# Allegro board layout_12.brd
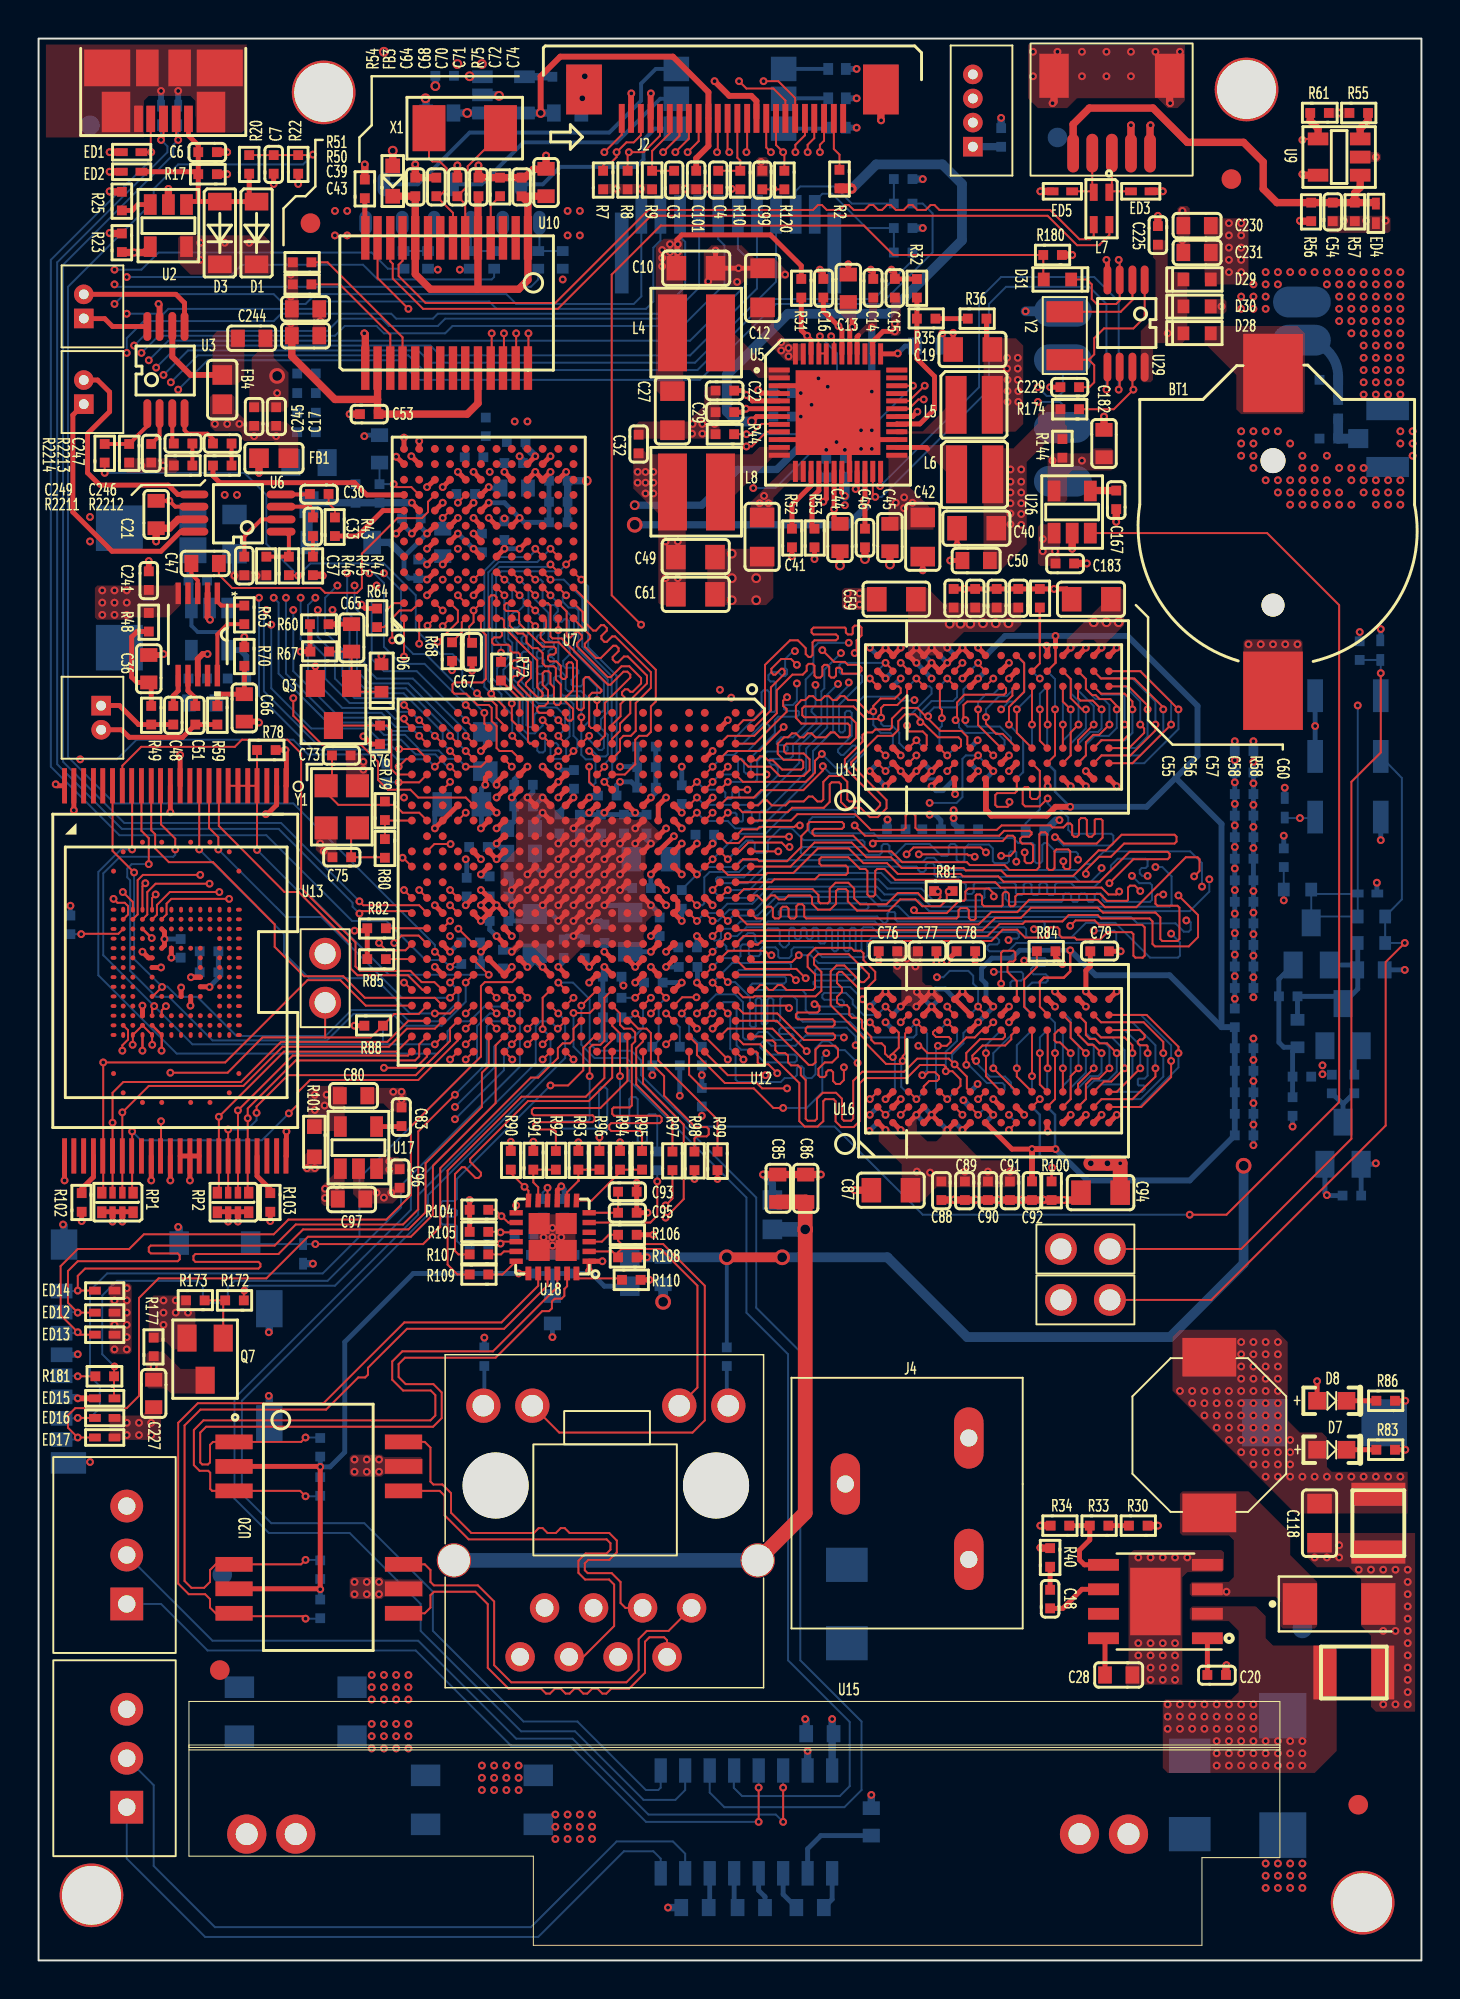
[diagram p0: board, top side]
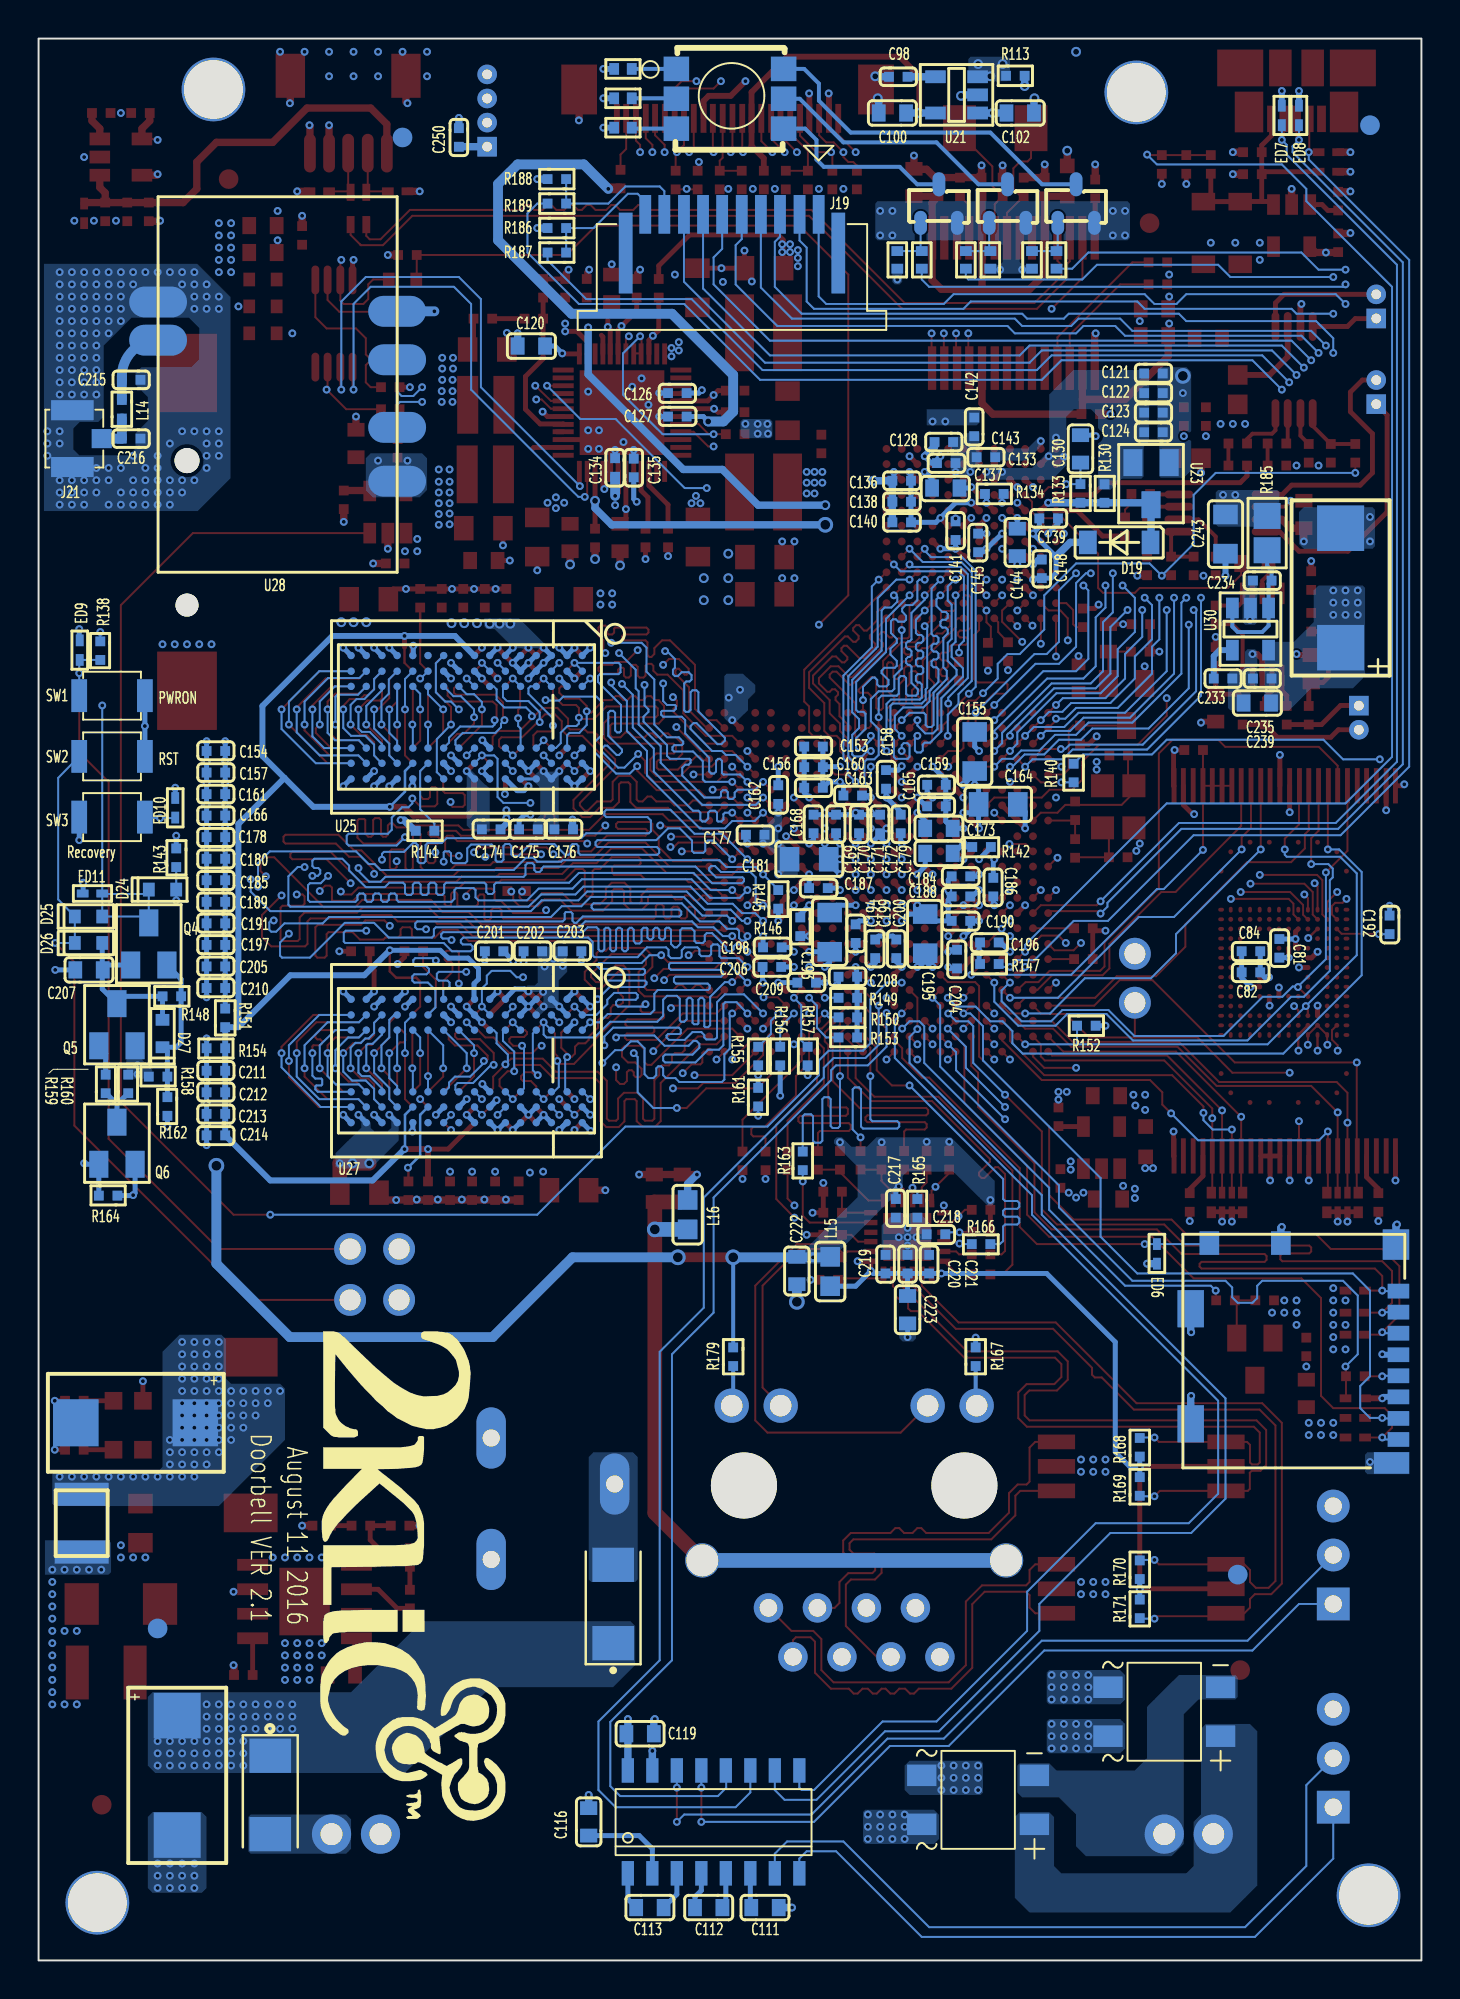
[diagram p1: board, bottom side, seen from below]

Outline 71.7 x 99.7 mm; copper layers: TOP, GND, VCC, SIG4, GND5, BOTTOM. Coordinates in mm from the lower left corner of the outline.
Outline path: rectangle 0,0 71.7,99.7

## Design rules (mm)
net group USB_CAM: nets N85032437 N85032439
net group USB_D1: nets HOST_DM1 HOST_DP1
net group USB_D2: nets HOST_DM2 HOST_DP2
net group USB_D3: nets HOST_DM3 HOST_DP3
net group USB_D4: nets HOST_DM4 HOST_DP4
net group USB_HOST: nets HOST_DM HOST_DP
net group USB_OTG: nets OTG_DM OTG_DP
net group CIF: nets CIF0_PDN CIF1_PDN CIF_CLKI CIF_CLKO CIF_D2 CIF_D3 CIF_D4 CIF_D5 CIF_D6 CIF_D7 CIF_D8 CIF_D9 CIF_HREF CIF_VSYNC
net group DDR_D0: nets DDR_D0 DDR_D1 DDR_D2 DDR_D3 DDR_D4 DDR_D5 DDR_D6 DDR_D7 DDR_DM0 DDR_DQS0M DDR_DQS0P
net group DDR_D1: nets DDR_D8 DDR_D9 DDR_D10 DDR_D11 DDR_D12 DDR_D13 DDR_D14 DDR_D15 DDR_DM1 DDR_DQS1M DDR_DQS1P
net group DDR_D2: nets DDR_D16 DDR_D17 DDR_D18 DDR_D19 DDR_D20 DDR_D21 DDR_D22 DDR_D23 DDR_DM2 DDR_DQS2M DDR_DQS2P
net group DDR_D3: nets DDR_D24 DDR_D25 DDR_D26 DDR_D27 DDR_D28 DDR_D29 DDR_D30 DDR_D31 DDR_DM3 DDR_DQS3M DDR_DQS3P
net group LCD1_RGB: nets LCDC_D0 LCDC_D1 LCDC_D2 LCDC_D3 LCDC_D4 LCDC_D5 LCDC_D6 LCDC_D7 LCDC_D8 LCDC_D9 LCDC_D10 LCDC_D11 LCDC_D12 LCDC_D13 LCDC_D14 LCDC_D15 LCDC_D16 LCDC_D17 LCDC_D18 LCDC_D19 LCDC_D20 LCDC_D21 LCDC_D22 LCDC_D23 LCDC_DE LCDC_HSYNC LCDC_VSYNC
net group NAND: nets FLASH_ALE FLASH_CLE FLASH_CS0 FLASH_CS1 FLASH_CS3 FLASH_RDN FLASH_RDY FLASH_WRN
net group RMII: nets RX+ RX- TX+ TX-
net group SDMMC: nets SDMMC_CLK SDMMC_CMD SDMMC_D0 SDMMC_D1 SDMMC_D2 SDMMC_D3
net group WENET: nets W_RXN W_RXP W_TXN W_TXP

## Placement (name value [footprint] x y rotation side)
BT1  BAT_3V  [BAT_CR1220]  64.01 73.99 0 top
C3  100nF  [C0402]  32.96 92.35 90 top
C4  8pF  [C0402]  35.24 92.35 90 top
C6  4.7uF  [C0402]  8.76 93.8 180 top
C7  10nF  [C0402]  12.19 93.17 90 top
C9  22uF  [CAP_1210]  69.47 22.68 270 top
C10  10uF  [C0805]  34.09 87.78 0 top
C11  22uF  [CAP_1210]  69.47 22.68 270 bottom
C12  10uF  [C0805]  37.54 86.77 270 top
C13  1uF  [C0603]  41.99 86.74 180 top
C14  2.2uF  [C0402]  43.28 86.74 270 top
C15  2.2uF  [C0402]  44.4 86.74 270 top
C16  2.2uF  [C0402]  40.69 86.74 270 top
C17  100nF  [C0402]  12.32 80.09 90 top
C18  4.7nF  [C0402]  52.45 18.75 90 top
C19  10uF  [C0805]  48.44 83.57 0 top
C20  10nF  [C0402]  61.09 14.81 0 top
C21  10uF  [C0603]  6.1 75.01 0 top
C22  2.2uF  [C0402]  35.59 81.43 0 top
C27  22uF  [C0805]  32.87 80.39 90 top
C28  100nF  [C0603]  56.01 14.81 90 top
C29  1uF  [C0402]  35.59 80.31 180 top
C30  100nF  [C0402]  14.55 76.07 180 top
C32  1uF  [C0402]  31.11 78.66 270 top
C33  100nF  [C0402]  14.22 74.37 90 top
C36  2.2uF  [C0603]  5.71 67.01 0 top
C37  1uF  [C0402]  10.67 72.34 90 top
C39  1uF  [C0603]  13.84 85.67 90 top
C40  22uF  [C0805]  48.64 74.3 180 top
C41  10uF  [C0805]  37.52 73.84 90 top
C42  10uF  [C0805]  45.85 73.84 90 top
C43  4.7uF  [C0603]  13.84 84.28 90 top
C44  1uF  [C0603]  41.55 73.81 0 top
C45  10uF  [C0603]  44.15 73.81 0 top
C46  2.2uF  [C0402]  42.85 73.79 90 top
C47  100nF  [C0603]  8.64 72.47 90 top
C48  100nF  [C0402]  6.99 64.59 90 top
C49  22uF  [C0805]  34.06 72.8 180 top
C50  10uF  [C0603]  48.62 72.62 270 top
C51  100nF  [C0402]  8.13 64.59 90 top
C53  100nF  [C0402]  17.14 80.21 0 top
C54  4.7uF  [C0402]  67.11 90.7 90 top
C55  100nF  [C0402]  47.45 70.66 90 top
C56  100nF  [C0402]  48.56 70.66 90 top
C57  100nF  [C0402]  49.68 70.66 90 top
C58  100nF  [C0402]  50.8 70.66 90 top
C59  10uF  [C0805]  44.48 70.61 0 top
C60  10uF  [C0805]  54.58 70.61 0 top
C61  10uF  [C0805]  34.06 70.87 0 top
C64  100nF  [C0402]  19.53 92 270 top
C65  1uF  [C0603]  16.23 68.61 0 top
C66  2.2uF  [C0603]  10.67 64.97 180 top
C67  1nF  [C0402]  22.48 67.87 270 top
C68  22pF  [C0402]  20.62 92 90 top
C70  22pF  [C0402]  21.72 92 90 top
C71  100nF  [C0402]  22.81 92 270 top
C72  100nF  [C0402]  25.04 92 270 top
C73  8pF  [C0402]  15.7 62.51 0 top
C74  4.7uF  [C0603]  26.31 92.23 180 top
C75  8pF  [C0402]  15.72 57.23 180 top
C76  100nF  [C0402]  44.04 52.35 180 top
C77  100nF  [C0402]  46.08 52.35 0 top
C78  100nF  [C0402]  48.08 52.35 180 top
C79  100nF  [C0402]  55.02 52.35 0 top
C80  4.7uF  [C0603]  16.33 44.86 270 top
C81  100nF  [C0402]  7.37 52.5 90 bottom
C82  100nF  [C0402]  8.84 51.26 0 bottom
C83  100nF/NC  [C0402]  18.82 43.76 270 top
C84  100nF  [C0402]  8.84 52.35 0 bottom
C85  100nF  [C0603]  38.33 40.06 180 top
C86  100nF  [C0603]  39.78 40.06 180 top
C87  10uF  [C0805]  44.2 39.95 0 top
C88  100nF  [C0402]  46.81 39.93 270 top
C89  100nF  [C0402]  48.03 39.93 270 top
C90  100nF  [C0402]  49.23 39.93 270 top
C91  100nF  [C0402]  50.37 39.93 270 top
C92  1nF  [C0402]  51.51 39.93 90 top
C93  100pF  [C0402]  30.53 39.88 0 top
C94  10uF  [C0805]  55.07 39.83 0 top
C95  1uF  [C0402]  30.53 38.79 0 top
C96  100nF/NC  [C0402]  18.72 40.56 270 top
C97  4.7uF/NC  [C0603]  16.23 39.5 270 top
C98  100nF  [C0402]  27.13 97.71 180 bottom
C99  NC  [C0402]  37.53 92.35 270 top
C100  10uF  [C0603]  27.43 95.83 90 bottom
C101  1uF  [C0402]  34.1 92.35 270 top
C102  4.7uF  [C0603]  20.8 95.83 270 bottom
C103  22uF  [CAP_1210]  68.2 14.94 0 top
C107  100uF/25v  [CAPP_TAJ_D]  64.52 9.6 270 bottom
C111  100nF  [C0603]  34.04 2.74 270 bottom
C112  100nF  [C0603]  36.96 2.74 90 bottom
C113  100nF  [C0603]  40.01 2.74 270 bottom
C114  220uF/10V  [CAPP_TAJ_D]  66.67 27.89 0 bottom
C116  100nF  [C0603]  43.18 7.19 180 bottom
C118  10uF  [C0805]  66.42 22.68 270 top
C119  100nF  [C0603]  40.51 11.76 90 bottom
C120  1uF  [C0603]  46.15 83.74 90 bottom
C121  100nF  [C0402]  13.89 82.32 180 bottom
C122  100nF  [C0402]  13.89 81.31 180 bottom
C123  100nF  [C0402]  13.89 80.29 180 bottom
C124  2.2uF  [C0402]  13.89 79.27 0 bottom
C126  2.2uF  [C0402]  38.58 81.31 180 bottom
C127  2.2uF  [C0402]  38.58 80.09 180 bottom
C128  100nF  [C0402]  24.77 78.77 0 bottom
C130  4.7uF  [C0603]  17.68 78.41 180 bottom
C133  1uF  [C0402]  24.64 77.67 180 bottom
C134  2.2uF  [C0402]  41.81 77.44 270 bottom
C135  47nF  [C0402]  40.84 77.42 90 bottom
C136  100nF  [C0402]  26.95 76.76 0 bottom
C137  4.7uF  [C0603]  24.66 76.38 90 bottom
C138  100nF  [C0402]  26.95 75.67 0 bottom
C139  100nF  [C0402]  19.33 74.8 180 bottom
C140  100nF  [C0402]  26.95 74.6 0 bottom
C141  100nF  [C0402]  24.16 74.17 90 bottom
C142  2.2uF  [C0402]  23.19 79.55 90 bottom
C143  100nF  [C0402]  22.58 77.98 180 bottom
C144  4.7uF  [C0603]  20.95 73.56 0 bottom
C145  100nF  [C0402]  22.99 73.53 90 bottom
C148  1uF  [C0402]  19.68 72.19 270 bottom
C153  1uF  [C0402]  31.52 62.97 0 bottom
C154  100nF  [C0402]  62.51 62.74 0 bottom
C155  10uF  [C0805]  23.16 62.71 90 bottom
C156  100nF  [C0402]  31.52 61.9 0 bottom
C157  100nF  [C0402]  62.51 61.62 0 bottom
C158  100nF  [C0402]  27.76 61.26 270 bottom
C159  100nF  [C0402]  25.15 60.99 180 bottom
C160  100nF  [C0402]  31.52 60.83 0 bottom
C161  100nF  [C0402]  62.51 60.5 0 bottom
C162  100nF  [C0402]  33.35 60.48 90 bottom
C163  100nF  [C0402]  29.49 60.43 180 bottom
C164  10uF  [C0805]  21.95 59.97 180 bottom
C165  100nF  [C0402]  25.15 59.87 180 bottom
C166  100nF  [C0402]  62.51 59.39 0 bottom
C167  100nF/NC  [C0402]  55.88 75.77 90 top
C168  100nF  [C0402]  31.52 58.95 270 bottom
C169  100nF  [C0402]  30.35 58.95 270 bottom
C170  100nF  [C0402]  29.16 58.95 270 bottom
C171  100nF  [C0402]  28.07 58.95 270 bottom
C172  100nF  [C0402]  27 58.95 90 bottom
C173  1uF  [C0603]  25.02 58.72 90 bottom
C174  100nF  [C0402]  48.23 58.67 180 bottom
C175  100nF  [C0402]  46.3 58.67 0 bottom
C176  100nF  [C0402]  44.48 58.67 180 bottom
C177  100nF  [C0402]  34.54 58.39 0 bottom
C178  100nF  [C0402]  62.51 58.27 0 bottom
C179  100nF  [C0603]  25.02 57.43 90 bottom
C180  100nF  [C0402]  62.51 57.15 0 bottom
C181  10uF  [C0805]  31.75 57.12 0 bottom
C182  4.7uF  [C0603]  55.24 78.69 180 top
C183  1uF  [C0402]  53.21 72.47 0 top
C184  10nF  [C0402]  23.88 56.24 0 bottom
C185  100nF  [C0402]  62.51 56.03 0 bottom
C186  100nF  [C0402]  22.2 55.68 90 bottom
C187  100nF  [C0402]  31.27 55.63 180 bottom
C188  100nF  [C0402]  23.88 55.19 0 bottom
C189  100nF  [C0402]  62.51 54.91 0 bottom
C190  1uF  [C0402]  23.88 53.92 0 bottom
C191  100nF  [C0402]  62.51 53.8 0 bottom
C192  100nF/NC  [C0402]  1.65 53.72 270 bottom
C193  10uF  [C0805]  30.68 53.34 90 bottom
C194  100nF  [C0402]  29.34 53.26 90 bottom
C195  10uF  [C0805]  25.73 53.26 90 bottom
C196  100nF  [C0402]  22.4 52.81 180 bottom
C197  100nF  [C0402]  62.51 52.68 0 bottom
C198  100nF  [C0402]  33.66 52.55 0 bottom
C199  100nF  [C0402]  28.32 52.48 270 bottom
C200  100nF  [C0402]  27.23 52.48 270 bottom
C201  100nF  [C0402]  48.08 52.35 180 bottom
C202  100nF  [C0402]  46.08 52.35 0 bottom
C203  100nF  [C0402]  44.04 52.35 180 bottom
C204  100nF  [C0402]  24.08 51.94 270 bottom
C205  100nF  [C0402]  62.51 51.56 0 bottom
C206  100nF  [C0402]  33.68 51.54 0 bottom
C207  1uF  [C0603]  69.09 51.38 270 bottom
C208  100nF  [C0402]  29.74 51.03 0 bottom
C209  100nF  [C0402]  31.88 50.72 0 bottom
C210  100nF  [C0402]  62.51 50.44 0 bottom
C211  1nF  [C0402]  62.51 46.15 0 bottom
C212  1nF  [C0402]  62.51 45.03 180 bottom
C213  1nF  [C0402]  62.51 43.92 0 bottom
C214  1nF  [C0402]  62.51 42.8 180 bottom
C215  NC  [C0402]  66.9 81.99 0 bottom
C216  NC  [C0402]  66.9 78.94 0 bottom
C217  100nF  [C0402]  27.25 39.01 90 bottom
C218  12pF  [C0402]  25.17 37.67 180 bottom
C219  100nF  [C0402]  27.79 36.12 90 bottom
C220  100nF  [C0402]  26.64 36.12 90 bottom
C221  22nF  [C0402]  25.53 36.12 90 bottom
C222  4.7uF  [C0603]  32.38 35.79 0 bottom
C223  4.7uF  [C0603]  26.64 33.76 180 bottom
C225  1uF  [C0402]  58.04 89.48 270 top
C227  4.7uF  [C0603]  5.97 29.41 180 top
C229  12pF  [C0402]  53.47 81.61 180 top
C230  4.7uF  [C0603]  60.07 89.99 90 top
C231  4.7uF  [C0603]  60.07 88.6 90 top
C233  22nF  [C0402]  10.29 66.5 180 bottom
C234  1uF  [C0402]  8.26 71.58 180 bottom
C235  1uF  [C0402]  8.26 66.5 180 bottom
C239  100nF  [C0603]  8.51 65.23 90 bottom
C240  220uF  [CAPP_TAJ_D]  4.19 71.2 90 bottom
C241  100nF  [C0402]  5.71 71.58 270 top
C243  10uF  [C0805]  10.16 73.99 270 bottom
C244  10uF  [C0603]  11.05 84.15 90 top
C245  100nF  [C0402]  11.18 80.09 90 top
C246  100nF  [C0402]  9.53 78.69 180 top
C247  1uF  [C0402]  5.84 78.18 90 top
C249  100nF  [C0402]  7.49 78.69 180 top
C250  100nF  [C0402]  49.91 94.56 270 bottom
D1  1N5819  [SOD123]  11.3 89.61 90 top
D3  1N5819  [SOD123]  9.4 89.61 90 top
D4  SS34  [SK34A]  67.44 18.49 0 top
D6  1N4148  [SOD523]  17.78 66.52 90 top
D7  LED  [SM0603LED_AC]  67.06 26.49 0 top
D8  LED  [SM0603LED_AC]  67.06 29.03 0 top
D11  MB1S-TP  [TO-269AA]  23.62 8.33 270 bottom
D12  SS34  [SK34A]  41.91 18.49 90 bottom
D19  1N5819  [SOD123]  15.67 73.56 180 bottom
D22  SS34  [SK34A]  59.69 8.59 270 bottom
D24  1N4148  [SOD523]  65.28 55.55 180 bottom
D25  1N4148  [SOD523]  69.11 54.15 180 bottom
D26  1N4148  [SOD523]  69.11 52.78 180 bottom
D27  1N4148  [SOD523]  65.28 48.08 90 bottom
D28  1N4148  [SOD523]  60.07 84.4 0 top
D29  1N4148/NC  [SOD523]  60.07 87.2 0 top
D30  1N4148  [SOD523]  60.07 85.8 0 top
D31  1N4148  [SOD523]  52.83 87.2 180 top
D32  MB1S-TP  [TO-269AA]  13.97 12.9 270 bottom
ED1  ESD9B5VL  [ESD0402]  4.83 93.8 180 top
ED2  ESD9B5VL  [ESD0402]  4.83 92.79 180 top
ED3  ESD9B5VL  [ESD0402]  57.15 91.77 0 top
ED4  ESD9B5VL  [ESD0402]  69.34 90.63 270 top
ED5  ESD9B5VL  [ESD0402]  53.09 91.77 180 top
ED6  ESD9B5VL  [ESD0402]  13.72 36.65 270 bottom
ED7  ESD9B5VL  [ESD0402]  7.24 95.71 90 bottom
ED8  ESD9B5VL  [ESD0402]  6.35 95.71 90 bottom
ED9  ESD9B5VL  [ESD0402]  69.57 67.97 270 bottom
ED10  ESD9B5VL  [ESD0402]  64.62 59.79 270 bottom
ED11  ESD9B5VL  [ESD0402]  68.91 55.35 180 bottom
ED12  ESD9B5VL  [ESD0402]  3.43 33.6 0 top
ED13  ESD9B5VL  [ESD0402]  3.43 32.46 0 top
ED14  ESD9B5VL  [ESD0402]  3.43 34.75 0 top
ED15  ESD9B5VL  [ESD0402]  3.43 29.16 180 top
ED16  ESD9B5VL  [ESD0402]  3.43 28.14 0 top
ED17  ESD9B5VL  [ESD0402]  3.43 27.13 0 top
FB1  BLM18PG181SN1  [L0603]  12.19 77.93 180 top
FB3  BLM18PG181SN1  [D0603]  18.36 92.3 270 top
FB4  BLM18PG181SN1  [L0603]  9.53 81.48 90 top
J2  OV2659  [FPC05P24]  35.98 96.93 180 top
J4  DCIN_JACK  [PJ-033A]  45.03 24.71 180 top
J5  HUM011D-5-S  [CON5_MICROUSB_SKT_SM]  6.48 96.85 270 top
J6  HEADER 3  [CONN3_BOX]  4.57 9.22 90 top
J7  HEADER 3  [CONN3_BOX]  4.57 19.76 90 top
J8  CON2  [HEARDER_2_PITCH_1P25MM]  2.79 81.36 180 top
J9  HEADER 7  [USB_CAM]  56.64 98.76 90 top
J10  CON2  [HEARDER_2_PITCH_1P25MM]  2.79 64.47 0 top
J13  CON2/NC  [CON_2]  14.86 50.95 90 top
J14  RJ45  [RJ45-VERTICAL]  29.54 19.63 270 top
J15  TF_SD_SOCKET  [USD_SOCKET]  0.89 31.57 90 bottom
J19  HEADER 10  [SFW10R-1STE1LF]  35.75 87.58 0 bottom
J21  CON3  [ANTENNA_WIFI]  69.95 78.94 90 bottom
J1838  LEDRGB  [SMD_LED_RGB]  36.32 96.72 180 bottom
J1839  CON2  [HEARDER_2_PITCH_1P25MM]  2.79 85.8 180 top
J1840  CON4  [HEARDER_4_PITCH_1P25MM]  48.9 95.96 180 top
L3  6.8uH/4.4A  [IND_HEX]  60.71 27.25 90 top
L4  2.2uH/3A  [IN4D_5X5]  34.11 84.43 90 top
L5  2.2uH/1.6A  [IND_3X3]  48.51 80.7 90 top
L6  2.2uH/1.6A  [IND_3X3]  48.54 77.09 90 top
L7  WCM-2012HDMI-900T  [WCM_2012HDMI_900T]  55.12 90.88 180 top
L8  2.2uH/3A  [IN4D_5X5]  34.11 76.17 90 top
L14  0R  [R0402]  67.39 80.47 90 bottom
L15  BLM18PG181SN1  [L0603]  30.66 35.74 270 bottom
L16  BLM18PG181SN1  [L0603]  38.05 38.68 270 bottom
NOREF  -  [unnamed]  68.43 8.08 0 top
NOREF#2  -  [unnamed#2]  14.78 96.9 0 top
NOREF#3  -  [unnamed]  61.85 92.41 0 top
NOREF#4  -  [unnamed]  14.1 90.12 0 top
NOREF#5  -  [unnamed#2]  62.64 97.05 0 top
NOREF#6  -  [unnamed#2]  68.66 3 0 top
NOREF#7  -  [unnamed#2]  2.74 3.38 0 top
NOREF#8  -  [unnamed]  9.4 15.06 0 top
NOREF#9  -  [unnamed]  65.53 17.22 180 bottom
NOREF#10  -  [unnamed]  9.53 20.02 180 bottom
NOREF#11  -  [#2]  57.12 32.64 270 bottom
NOREF#12  -  [unnamed]  52.83 94.56 180 bottom
NOREF#13  -  [unnamed]  2.67 95.2 180 bottom
Q3  SI2302  [SOT23]  15.29 65.15 180 top
Q4  SI2301  [SOT23]  65.99 52.73 180 bottom
Q5  SI2302  [SOT23]  67.64 48.54 180 bottom
Q6  SI2301  [SOT23]  67.64 42.39 180 bottom
Q7  SI2301  [SOT23]  8.64 31.19 180 top
Q806  C1815  [SOT23_2]  17.91 91.14 90 bottom
Q807  C1815  [SOT23_2]  21.46 91.14 90 bottom
Q808  C1815  [SOT23_2]  25.02 91.14 90 bottom
R2  0R  [R0402]  41.53 92.41 90 top
R7  1.5K  [R0402]  29.27 92.35 90 top
R8  1.5K  [R0402]  30.54 92.35 90 top
R9  10K  [R0402]  31.81 92.35 270 top
R10  22R  [R0402]  36.39 92.35 90 top
R17  10K  [R0402]  8.76 92.66 180 top
R20  10K  [R0402]  10.92 93.17 270 top
R22  15K  [R0402]  13.46 93.17 90 top
R23  47K  [R0402]  4.32 89.1 270 top
R25  NC  [R0402]  4.32 91.26 270 top
R30  1K  [R0402]  57.02 22.56 0 top
R31  100R  [R0402]  39.55 86.74 90 top
R32  20K  [R0402]  45.54 86.74 270 top
R33  44.2K  [R0402]  54.99 22.56 0 top
R34  10K  [R0402]  52.96 22.56 0 top
R35  4.99K  [R0402]  46.02 85.17 180 top
R36  100R  [R0402]  48.67 85.17 180 top
R40  20K  [R0402]  52.45 20.9 90 top
R43  62K  [R0402]  15.37 74.37 270 top
R44  100K  [R0402]  35.59 79.17 0 top
R45  30K  [R0402]  14.22 72.34 270 top
R46  1M  [R0402]  11.81 72.34 270 top
R47  100K  [R0402]  12.98 72.34 270 top
R48  1K  [R0402]  5.71 69.42 270 top
R49  1K  [R0402]  5.84 64.59 270 top
R50  4.7K  [R0402]  13.67 86.94 180 top
R51  100K  [R0402]  13.67 88.09 180 top
R52  100R  [R0402]  39.07 73.79 270 top
R53  10K  [R0402]  40.23 73.79 270 top
R54  10K  [R0402]  16.92 91.9 270 top
R55  NC  [R0402]  68.45 95.83 0 top
R56  0R/NC  [R0402]  65.99 90.7 270 top
R57  10K  [R0402]  68.25 90.7 90 top
R58  240R%1  [R0402]  51.92 70.66 270 top
R59  1K  [R0402]  9.27 64.59 90 top
R60  10K  [R0402]  14.55 69.32 0 top
R61  47K  [R0402]  66.42 95.83 180 top
R63  11K  [R0402]  10.67 69.8 270 top
R64  2K  [R0402]  17.55 69.65 270 top
R67  1M  [R0402]  14.58 67.89 0 top
R68  4.7K  [R0402]  21.44 67.89 270 top
R70  1K  [R0402]  10.67 67.64 90 top
R72  0R  [R0402]  23.98 66.88 270 top
R75  680R  [R0402]  23.93 92 270 top
R76  10K  [R0402]  17.7 63.58 90 top
R78  4.7K  [R0402]  11.81 62.79 180 top
R79  1M  [R0402]  17.96 59.64 90 top
R80  22R  [R0402]  17.96 57.68 90 top
R81  100R  [R0402]  46.91 55.47 180 top
R82  200R  [R0402]  17.53 53.54 0 top
R83  1K  [R0402]  69.85 26.49 180 top
R84  240R%1  [R0402]  52.25 52.35 180 top
R85  200R  [R0402]  17.53 51.94 0 top
R86  680R  [R0402]  69.85 29.03 0 top
R88  10K/NC  [R0402]  17.37 48.49 0 top
R90  2K  [R0402]  24.49 41.5 270 top
R91  NC  [R0402]  25.65 41.5 270 top
R92  22R  [R0402]  26.82 41.5 270 top
R93  4.7K  [R0402]  27.99 41.5 270 top
R94  4.7K  [R0402]  30.15 41.5 270 top
R95  22R  [R0402]  31.29 41.5 270 top
R96  22R  [R0402]  29.08 41.5 270 top
R97  22R  [R0402]  32.87 41.48 270 top
R98  22R  [R0402]  34.01 41.48 270 top
R99  22R  [R0402]  35.2 41.48 270 top
R100  240R%1  [R0402]  52.53 39.93 90 top
R101  0R  [R0603]  14.3 42.47 90 top
R102  NC  [R0402]  2.24 39.32 270 top
R103  NC  [R0402]  12.01 39.32 270 top
R104  4.7K  [R0402]  22.83 38.94 0 top
R105  10K  [R0402]  22.83 37.8 0 top
R106  10K  [R0402]  30.53 37.64 0 top
R107  22R  [R0402]  22.83 36.63 0 top
R108  10K  [R0402]  30.53 36.47 0 top
R109  22R  [R0402]  22.83 35.59 0 top
R110  12.1K%1  [R0402]  30.73 35.31 0 top
R113  10K  [R0402]  21.06 97.76 180 bottom
R120  22R  [R0402]  38.67 92.35 90 top
R130  0R/NC  [R0402]  16.43 76.1 90 bottom
R133  0R  [R0402]  17.68 76.1 270 bottom
R134  12K  [R0402]  22.15 76.07 180 bottom
R138  51K  [R0402]  68.5 67.95 270 bottom
R140  4.7K  [R0402]  18.03 61.59 270 bottom
R141  240R%1  [R0402]  51.66 58.6 180 bottom
R142  0R  [R0402]  22.81 57.76 0 bottom
R143  10K  [R0402]  64.57 57.2 90 bottom
R144  0R/NC  [R0402]  53.09 78.44 270 top
R145  2K  [R0402]  33.35 55.04 270 bottom
R146  240R%1  [R0402]  32.21 53.62 90 bottom
R147  10K  [R0402]  22.4 51.69 180 bottom
R148  1M  [R0402]  64.8 50.01 180 bottom
R149  10K  [R0402]  29.74 49.94 180 bottom
R150  10K  [R0402]  29.74 48.92 180 bottom
R151  10K  [R0402]  62.03 48.89 270 bottom
R152  10K/NC  [R0402]  17.37 48.49 0 bottom
R153  10K  [R0402]  29.74 47.88 180 bottom
R154  10K  [R0402]  62.51 47.32 180 bottom
R155  2K  [R0402]  34.39 46.91 90 bottom
R156  2K  [R0402]  33.25 46.91 90 bottom
R157  2K  [R0402]  31.83 46.91 90 bottom
R158  10K  [R0402]  65.51 45.85 180 bottom
R159  47K  [R0402]  68.22 45.47 90 bottom
R160  1M  [R0402]  67.06 45.47 90 bottom
R161  2K  [R0402]  34.39 44.78 270 bottom
R162  4.7K  [R0402]  65.02 44.3 90 bottom
R163  22R  [R0402]  32.08 41.48 270 bottom
R164  1M  [R0402]  68.1 39.67 0 bottom
R165  4.7K  [R0402]  26.14 39.01 90 bottom
R166  22R  [R0402]  22.83 37.16 0 bottom
R167  470R  [R0402]  23.11 31.32 90 bottom
R168  49.9R%1  [R0402]  14.61 26.62 90 bottom
R169  49.9R%1  [R0402]  14.61 24.59 270 bottom
R170  49.9R%1  [R0402]  14.61 20.27 90 bottom
R171  49.9R%1  [R0402]  14.61 18.24 270 bottom
R172  1K  [R0402]  10.16 34.24 0 top
R173  100K  [R0402]  8.13 34.24 180 top
R174  10K  [R0402]  53.47 80.47 0 top
R177  0R/NC  [R0402]  5.97 31.83 270 top
R179  470R  [R0402]  35.69 31.32 90 bottom
R180  10K  [R0402]  52.58 88.47 0 top
R181  22R  [R0402]  3.43 30.3 180 top
R185  10  [R0805]  8 74.04 270 bottom
R186  0R/NM  [R0402]  44.83 89.87 180 bottom
R187  0R  [R0402]  44.83 88.6 180 bottom
R188  0R/NM  [R0402]  44.83 92.41 0 bottom
R189  0R  [R0402]  44.83 91.14 180 bottom
R2202  220R  [SMR0402]  41.4 98.12 180 bottom
R2203  220R  [SMR0402]  41.4 96.6 180 bottom
R2204  220R  [SMR0402]  41.4 95.07 180 bottom
R2205  1K  [SMR0402]  18.92 88.21 90 bottom
R2206  10K  [SMR0402]  20.19 88.21 270 bottom
R2207  1K  [SMR0402]  23.62 88.21 90 bottom
R2208  10K  [SMR0402]  22.35 88.21 270 bottom
R2209  1K  [SMR0402]  25.91 88.21 90 bottom
R2210  10K  [SMR0402]  27.18 88.21 270 bottom
R2211  30K  [R0402]  7.49 77.55 180 top
R2212  62K  [R0402]  9.53 77.55 180 top
R2213  1M  [R0402]  4.7 78.18 270 top
R2214  100K  [R0402]  3.43 78.18 270 top
RP1  10K/NC  [RCA80-8]  4.09 39.32 0 top
RP2  10K/NC  [RCA80-8]  10.08 39.32 0 top
SW1  Power  [B3U-1000P]  67.89 65.61 180 bottom
SW2  Power  [B3U-1000P]  67.89 62.46 180 bottom
SW3  Power  [B3U-1000P]  67.89 59.31 0 bottom
U2  TCS9708  [SOT23-5]  6.73 89.99 180 top
U3  TCS8642B/PT5305N_DS  [MSOP8]  6.6 82.5 0 top
U4  -  [MP2365]  57.91 18.62 90 top
U5  ACT8846QM460  [QFN48]  41.45 80.29 270 top
U6  TCS8642B/PT5305N_DS  [MSOP8]  10.31 75.08 90 top
U7  RK610&616-G  [RK616_BGA144]  23.34 74.02 90 top
U8  MAX4062  [USOP_10P]  8.26 68.78 270 top
U9  TCS9708  [SOT23-5]  67.44 93.55 90 top
U10  GL850G  [SSOP28]  21.16 85.98 180 top
U11  DDR3-512MB  [FBGA96-10X14]  49.5 64.49 90 top
U12  RK3188  [BGA453-19X19]  28.14 55.93 270 top
U13  NAND_FLASH  [TSOP48]  7.09 51.33 270 top
U14  SDIN7DP2-4G  [FBGA169_0P5_14X18MM]  7.14 51.26 0 top
U15  POE MODULE  [POE]  35.56 5.92 0 top
U16  DDR3-512MB  [FBGA96-10X14]  49.5 46.66 90 top
U17  RT9167-30/NC  [SOT23-5]  16.59 42.16 0 top
U18  LAN8720A  [LAN8270A]  26.67 37.62 90 top
U20  MS10232  [TRC41604NL]  14.55 22.43 270 top
U21  AP7331-15  [SOT-25]  24.1 96.77 90 bottom
U22  MAX3232  [SOIC16]  36.7 7.19 90 bottom
U23  PT5110_2.5V  [SOT23]  14.02 76.61 0 bottom
U25  DDR3-512MB  [FBGA96-10X14]  49.5 64.49 270 bottom
U26  PT5108E23E-33/RT9013-33B  [SOT23-5]  53.59 75.13 0 top
U27  DDR3-512MB  [FBGA96-10X14]  49.5 46.66 270 bottom
U28  RL-UM12BS-8188EUS  [WIFI_BT_R]  59.31 81.74 90 bottom
U29  HYM8563  [MSOP8]  56.39 84.91 180 top
U30  RT9193-33GB  [SOT23-5]  8.86 69.06 0 bottom
UNK1  CON2/NC  [CON_2]  54.28 36.91 0 top
UNK2  CON2/NC  [CON_2]  54.28 34.26 0 top
X1  12M/20pF  [5032-12M]  22.1 95.05 180 top
Y1  24M-20ppm  [CRY3225_M]  15.72 59.84 90 top
Y2  32.768K  [CM315D]  53.21 84.28 270 top

## Library data of the parts
BT1 J13 UNK1 UNK2 = CON2
C3 C4 C6 C7 C17 C18 C20 C28 C30 C32 C33 C36 C37 C54 C66 C67 C73 C75 C80-C84 C96-C102 C111-C113 C116 C119 C121-C124 C128 C133 C135 C136 C138-C141 C143 C145 C148 C153 C155 C156 C158-C160 C163-C165 C168-C173 C179 C182 C184 C186 C188 C190 C192-C196 C199 C200 C204 C208 C209 C219 C220 C223 C225 C227 C229-C231 C233-C235 C239 C241 C245-C247 C249 C250 = CAP NP
C9 C11 C103 = CAP NP: User Part Number: PartNr
C10 C61 = CAP NP_2: room: USB+5V
C12 C19 C21 C27 C40-C42 C45 C49 C50 C118 C137 C142 C144 C183 C244 = CAP NP: room: USB+5V
C13-C16 C22 C29 C44 C46 C120 C126 C127 C130 C134 C207 = CAP NP_2: room: CHG
C39 C43 C65 C74 = CAPACITOR_0
C47 = CAPC-SM0402_10
C48 C51 = CAP NP_1
C53 C64 C68 C70-C72 = CAPACITOR
C55-C58 C76-C79 C88-C92 C154 C157 C161 C162 C166 C174-C178 C180 C185 C187 C189 C191 C197 C198 C201-C203 C205 C206 C210-C214 = CAP NP_0
C59 C60 C87 C93-C95 C167 C181 C217 C218 C222 = CAP NP_4
C85 C86 C221 = CAP NP_2
C107 C114 = CAP: User Part Number: PartNr
C215 C216 = C0603
C240 = CAPC-SM0402_10: User Part Number: PartNr
C243 = C0805
D1 D3 D6 D28-D31 = DIODE_0
D4 D12 = SS34_1
D7 = LED_1
D8 = LED_2
D11 D32 = DIODE BRIDGE_0
D19 = DIODE: room: BATT
D22 = SS34_0
D24-D27 = DIODE: room: CHG
ED1-ED17 = TVS
FB1 FB3 FB4 L3 L15 L16 = INDUCTOR
J2 = OV2659
J4 J8 J1839 J1840 = CON2_0
J5 = USB MIN_6
J6 J7 = HEADER 3
J9 = HEADER 7_0
J10 = HEADER 2
J14 = RJ45_0
J15 = TF_SD_SOCKET_0
J19 = HEADER 10
J21 = CON3
J1838 = CON6A
L4-L6 L8 = INDUCTOR_1: room: USB+5V
L7 = INDUCTOR-COM_0
L14 = INDUCTOR_0
Q3 Q5 = MOSFET N
Q4 Q6 = MOSFET N_0
Q7 = MOSFET P: room: CHG
Q806 Q808 = NPN BCE_0: User Part Number: PartNr
Q807 = NPN BCE_1: User Part Number: PartNr
R2 R7-R10 R17 R20 R22 R23 R25 R43 R45-R47 R50 R51 R54-R57 R60 R61 R67 R75 R76 R78-R80 R82 R85 R86 R88 R101-R103 R113 R120 R134 R138 R140 R143 R144 R147-R150 R152 R153 R155-R162 R164 R172 R177 R181 R185-R189 R2211-R2214 = RESISTOR
R30 R34 = RES-SM0402_0
R31 R32 R35 R36 R52 R91 R93 R94 R104 R105 R142 R165 = RESISTOR_1: room: USB+5V
R33 = RES-SM0402_1
R40 = RES-SM0402_2
R44 R58 R64 R68 R72 R81 R84 R100 R133 R141 R145 R146 R151 R154 = RESISTOR_0
R48 R49 R59 R63 R70 R2202-R2210 = RES-SM0603_2
R53 R173 R174 R180 = RESISTOR_4
R83 = RESD,0402,5%,1/16W,4.7K: tolerance: 5%
R90 R92 R95-R99 R106-R110 R163 R166 R167 R179 = 4,7k-0603: tolerance: 5%
R130 = R0402
R168-R171 = 100k-0603: tolerance: 5%
RP1 RP2 = RESISTOR 4PACK
SW1-SW3 = SW PUSHBUTTON
U2 U9 = LPW5206H
U3 U6 = LM4990
U4 = LM2576/TO_0
U5 = ACT8847_0
U7 = RKJETTA_BGA_0
U8 = max4062_2
U10 = GLI8024-48_3
U11 U16 U25 U27 = DDRII_3
U12 = RK3188_0
U13 = NANDFLASH_0
U14 = TMP_105147
U15 = AG8012S_0
U17 U21 U26 = DS8008_4
U18 = LAN8720A_0
U20 = LAN1102_0
U22 = MAX3232_0: User Part Number: ***; Tolerance: ***
U23 = CE71XXMM
U28 = WM-294_0
U29 = LM4990_0
U30 = RT9193-33GB
X1 Y2 = CRYSTAL DIP DT38 R_2.A
Y1 = CRYSTAL-4_0

## Footprints (pads in the part's own frame, mm; a bottom-side part is the same pattern mirrored in y, then rotated)
5032-12M
  rect 1.702x2.388 smd: 1(-1.854,0) 2(1.854,0)
ANTENNA_WIFI
  rect 1.041x2.21 smd: 1(-1.473,0) 2(1.473,0)
  rect 0.991x1.041 smd: 3(0,-1.524)
B3U-1000P
  rect 0.813x1.702 smd: 1(-1.702,0) 2(1.702,0)
BAT_CR1220
  round 1.295 hole 1.295 unplated: (0,3.81)
  round 1.194 hole 1.194 unplated: (0,-3.683)
  rect 3.099x4.064 smd: 1(0,8.357) 2(0,-8.128)
BGA453-19X19
  round 0.406 smd: A1(-8.788,8.788) A2(-8.001,8.788) A4(-6.401,8.788) A5(-5.588,8.788) A7(-3.988,8.788) A8(-3.2,8.788) A10(-1.6,8.788) A11(-0.813,8.788) A13(0.813,8.788) A14(1.6,8.788) A16(3.2,8.788) A17(3.988,8.788) A19(5.588,8.788) A20(6.401,8.788) A22(8.001,8.788) A23(8.788,8.788) AA2(-8.001,-7.188) AA3(-7.188,-7.188) AA4(-6.401,-7.188) AA5(-5.588,-7.188) AA6(-4.801,-7.188) AA7(-3.988,-7.188) AA8(-3.2,-7.188) AA9(-2.388,-7.188) AA10(-1.6,-7.188) AA11(-0.813,-7.188) AA12(0,-7.188) AA13(0.813,-7.188) AA14(1.6,-7.188) AA15(2.388,-7.188) AA16(3.2,-7.188) AA17(3.988,-7.188) AA18(4.801,-7.188) AA19(5.588,-7.188) AA20(6.401,-7.188) AA21(7.188,-7.188) AA22(8.001,-7.188) AB1(-8.788,-8.001) AB2(-8.001,-8.001) AB3(-7.188,-8.001) AB4(-6.401,-8.001) AB5(-5.588,-8.001) AB6(-4.801,-8.001) AB7(-3.988,-8.001) AB8(-3.2,-8.001) AB9(-2.388,-8.001) AB10(-1.6,-8.001) AB11(-0.813,-8.001) AB12(0,-8.001) AB13(0.813,-8.001) AB14(1.6,-8.001) AB15(2.388,-8.001) AB16(3.2,-8.001) AB17(3.988,-8.001) AB18(4.801,-8.001) AB19(5.588,-8.001) AB20(6.401,-8.001) AB21(7.188,-8.001) AB22(8.001,-8.001) AB23(8.788,-8.001) AC1(-8.788,-8.788) AC2(-8.001,-8.788) AC4(-6.401,-8.788) AC5(-5.588,-8.788) AC7(-3.988,-8.788) AC8(-3.2,-8.788) AC10(-1.6,-8.788) AC11(-0.813,-8.788) AC13(0.813,-8.788) AC14(1.6,-8.788) AC16(3.2,-8.788) AC17(3.988,-8.788) AC19(5.588,-8.788) AC20(6.401,-8.788) AC22(8.001,-8.788) AC23(8.788,-8.788) B1(-8.788,8.001) B2(-8.001,8.001) B3(-7.188,8.001) B4(-6.401,8.001) B5(-5.588,8.001) B6(-4.801,8.001) B7(-3.988,8.001) B8(-3.2,8.001) B9(-2.388,8.001) B10(-1.6,8.001) B11(-0.813,8.001) B12(0,8.001) B13(0.813,8.001) B14(1.6,8.001) B15(2.388,8.001) B16(3.2,8.001) B17(3.988,8.001) B18(4.801,8.001) B19(5.588,8.001) B20(6.401,8.001) B21(7.188,8.001) B22(8.001,8.001) B23(8.788,8.001) C2(-8.001,7.188) C3(-7.188,7.188) C4(-6.401,7.188) C5(-5.588,7.188) C6(-4.801,7.188) C7(-3.988,7.188) C8(-3.2,7.188) C9(-2.388,7.188) C10(-1.6,7.188) C11(-0.813,7.188) C12(0,7.188) C13(0.813,7.188) C14(1.6,7.188) C15(2.388,7.188) C16(3.2,7.188) C17(3.988,7.188) C18(4.801,7.188) C19(5.588,7.188) C20(6.401,7.188) C21(7.188,7.188) C22(8.001,7.188) D1(-8.788,6.401) D2(-8.001,6.401) D3(-7.188,6.401) D4(-6.401,6.401) D5(-5.588,6.401) D6(-4.801,6.401) D7(-3.988,6.401) D8(-3.2,6.401) D10(-1.6,6.401) D11(-0.813,6.401) D13(0.813,6.401) D14(1.6,6.401) D16(3.2,6.401) D17(3.988,6.401) D18(4.801,6.401) D19(5.588,6.401) D20(6.401,6.401) D21(7.188,6.401) D22(8.001,6.401) D23(8.788,6.401) E1(-8.788,5.588) E2(-8.001,5.588) E3(-7.188,5.588) E4(-6.401,5.588) E6(-4.801,5.588) E7(-3.988,5.588) E8(-3.2,5.588) E10(-1.6,5.588) E11(-0.813,5.588) E13(0.813,5.588) E14(1.6,5.588) E16(3.2,5.588) E17(3.988,5.588) E18(4.801,5.588) E20(6.401,5.588) E21(7.188,5.588) E22(8.001,5.588) E23(8.788,5.588) F2(-8.001,4.801) F3(-7.188,4.801) F4(-6.401,4.801) F5(-5.588,4.801) F7(-3.988,4.801) F8(-3.2,4.801) F10(-1.6,4.801) F11(-0.813,4.801) F13(0.813,4.801) F14(1.6,4.801) F16(3.2,4.801) F17(3.988,4.801) F19(5.588,4.801) F20(6.401,4.801) F21(7.188,4.801) F22(8.001,4.801) G1(-8.788,3.988) G2(-8.001,3.988) G3(-7.188,3.988) G4(-6.401,3.988) G5(-5.588,3.988) G6(-4.801,3.988) G8(-3.2,3.988) G9(-2.388,3.988) G10(-1.6,3.988) G11(-0.813,3.988) G12(0,3.988) G13(0.813,3.988) G14(1.6,3.988) G15(2.388,3.988) G16(3.2,3.988) G18(4.801,3.988) G19(5.588,3.988) G20(6.401,3.988) G21(7.188,3.988) G22(8.001,3.988) G23(8.788,3.988) H1(-8.788,3.2) H2(-8.001,3.2) H3(-7.188,3.2) H4(-6.401,3.2) H5(-5.588,3.2) H6(-4.801,3.2) H7(-3.988,3.2) H8(-3.2,3.2) H9(-2.388,3.2) H10(-1.6,3.2) H11(-0.813,3.2) H12(0,3.2) H13(0.813,3.2) H14(1.6,3.2) H15(2.388,3.2) H16(3.2,3.2) H17(3.988,3.2) H18(4.801,3.2) H19(5.588,3.2) H20(6.401,3.2) H21(7.188,3.2) H22(8.001,3.2) H23(8.788,3.2) J2(-8.001,2.388) J3(-7.188,2.388) J7(-3.988,2.388) J8(-3.2,2.388) J9(-2.388,2.388) J10(-1.6,2.388) J11(-0.813,2.388) J12(0,2.388) J13(0.813,2.388) J14(1.6,2.388) J15(2.388,2.388) J16(3.2,2.388) J17(3.988,2.388) J21(7.188,2.388) J22(8.001,2.388) K1(-8.788,1.6) K2(-8.001,1.6) K3(-7.188,1.6) K4(-6.401,1.6) K5(-5.588,1.6) K6(-4.801,1.6) K7(-3.988,1.6) K8(-3.2,1.6) K9(-2.388,1.6) K10(-1.6,1.6) K11(-0.813,1.6) K12(0,1.6) K13(0.813,1.6) K14(1.6,1.6) K15(2.388,1.6) K16(3.2,1.6) K17(3.988,1.6) K18(4.801,1.6) K19(5.588,1.6) K20(6.401,1.6) K21(7.188,1.6) K22(8.001,1.6) K23(8.788,1.6) L1(-8.788,0.813) L2(-8.001,0.813) L3(-7.188,0.813) L4(-6.401,0.813) L5(-5.588,0.813) L6(-4.801,0.813) L7(-3.988,0.813) L8(-3.2,0.813) L9(-2.388,0.813) L10(-1.6,0.813) L11(-0.813,0.813) L12(0,0.813) L13(0.813,0.813) L14(1.6,0.813) L15(2.388,0.813) L16(3.2,0.813) L17(3.988,0.813) L18(4.801,0.813) L19(5.588,0.813) L20(6.401,0.813) L21(7.188,0.813) L22(8.001,0.813) L23(8.788,0.813) M2(-8.001,0) M3(-7.188,0) M7(-3.988,0) M8(-3.2,0) M9(-2.388,0) M10(-1.6,0) M11(-0.813,0) M12(0,0) M13(0.813,0) M14(1.6,0) M15(2.388,0) M16(3.2,0) M17(3.988,0) M21(7.188,0) M22(8.001,0) N1(-8.788,-0.813) N2(-8.001,-0.813) N3(-7.188,-0.813) N4(-6.401,-0.813) N5(-5.588,-0.813) N6(-4.801,-0.813) N7(-3.988,-0.813) N8(-3.2,-0.813) N9(-2.388,-0.813) N10(-1.6,-0.813) N11(-0.813,-0.813) N12(0,-0.813) N13(0.813,-0.813) N14(1.6,-0.813) N15(2.388,-0.813) N16(3.2,-0.813) N17(3.988,-0.813) N18(4.801,-0.813) N19(5.588,-0.813) N20(6.401,-0.813) N21(7.188,-0.813) N22(8.001,-0.813) N23(8.788,-0.813) P1(-8.788,-1.6) P2(-8.001,-1.6) P3(-7.188,-1.6) P4(-6.401,-1.6) P5(-5.588,-1.6) P6(-4.801,-1.6) P7(-3.988,-1.6) P8(-3.2,-1.6) P9(-2.388,-1.6) P10(-1.6,-1.6) P11(-0.813,-1.6) P12(0,-1.6) P13(0.813,-1.6) P14(1.6,-1.6) P15(2.388,-1.6) P16(3.2,-1.6) P17(3.988,-1.6) P18(4.801,-1.6) P19(5.588,-1.6) P20(6.401,-1.6) P21(7.188,-1.6) P22(8.001,-1.6) P23(8.788,-1.6) R2(-8.001,-2.388) R3(-7.188,-2.388) R7(-3.988,-2.388) R8(-3.2,-2.388) R9(-2.388,-2.388) R10(-1.6,-2.388) R11(-0.813,-2.388) R12(0,-2.388) R13(0.813,-2.388) R14(1.6,-2.388) R15(2.388,-2.388) R16(3.2,-2.388) R17(3.988,-2.388) R21(7.188,-2.388) R22(8.001,-2.388) T1(-8.788,-3.2) T2(-8.001,-3.2) T3(-7.188,-3.2) T4(-6.401,-3.2) T5(-5.588,-3.2) T6(-4.801,-3.2) T7(-3.988,-3.2) T8(-3.2,-3.2) T9(-2.388,-3.2) T10(-1.6,-3.2) T11(-0.813,-3.2) T12(0,-3.2) T13(0.813,-3.2) T14(1.6,-3.2) T15(2.388,-3.2) T16(3.2,-3.2) T17(3.988,-3.2) T18(4.801,-3.2) T19(5.588,-3.2) T20(6.401,-3.2) T21(7.188,-3.2) T22(8.001,-3.2) T23(8.788,-3.2) U1(-8.788,-3.988) U2(-8.001,-3.988) U3(-7.188,-3.988) U4(-6.401,-3.988) U5(-5.588,-3.988) U6(-4.801,-3.988) U8(-3.2,-3.988) U9(-2.388,-3.988) U10(-1.6,-3.988) U11(-0.813,-3.988) U12(0,-3.988) U13(0.813,-3.988) U14(1.6,-3.988) U15(2.388,-3.988) U16(3.2,-3.988) U18(4.801,-3.988) U19(5.588,-3.988) U20(6.401,-3.988) U21(7.188,-3.988) U22(8.001,-3.988) U23(8.788,-3.988) V2(-8.001,-4.801) V3(-7.188,-4.801) V4(-6.401,-4.801) V5(-5.588,-4.801) V7(-3.988,-4.801) V8(-3.2,-4.801) V10(-1.6,-4.801) V11(-0.813,-4.801) V13(0.813,-4.801) V14(1.6,-4.801) V16(3.2,-4.801) V17(3.988,-4.801) V19(5.588,-4.801) V20(6.401,-4.801) V21(7.188,-4.801) V22(8.001,-4.801) W1(-8.788,-5.588) W2(-8.001,-5.588) W3(-7.188,-5.588) W4(-6.401,-5.588) W6(-4.801,-5.588) W7(-3.988,-5.588) W8(-3.2,-5.588) W10(-1.6,-5.588) W11(-0.813,-5.588) W13(0.813,-5.588) W14(1.6,-5.588) W16(3.2,-5.588) W17(3.988,-5.588) W18(4.801,-5.588) W20(6.401,-5.588) W21(7.188,-5.588) W22(8.001,-5.588) W23(8.788,-5.588) Y1(-8.788,-6.401) Y2(-8.001,-6.401) Y3(-7.188,-6.401) Y4(-6.401,-6.401) Y5(-5.588,-6.401) Y6(-4.801,-6.401) Y7(-3.988,-6.401) Y8(-3.2,-6.401) Y10(-1.6,-6.401) Y11(-0.813,-6.401) Y13(0.813,-6.401) Y14(1.6,-6.401) Y16(3.2,-6.401) Y17(3.988,-6.401) Y18(4.801,-6.401) Y19(5.588,-6.401) Y20(6.401,-6.401) Y21(7.188,-6.401) Y22(8.001,-6.401) Y23(8.788,-6.401)
C0402
  rect 0.508x0.508 smd: 1(-0.483,0) 2(0.483,0)
C0603
  rect 0.889x0.711 smd: 1(0,0.711) 2(0,-0.711)
C0805
  rect 1.016x1.27 smd: 1(-1.016,0) 2(1.016,0)
CAP_1210
  rect 1.194x2.794 smd: 1(-1.499,0) 2(1.499,0)
CAPP_TAJ_D
  rect 2.362x2.438 smd: 1(-3.099,0) 2(3.099,0)
CM315D
  rect 1.092x1.905 smd: 1(-1.245,0) 2(1.245,0)
CON5_MICROUSB_SKT_SM
  rect 1.372x0.457 smd: 1(1.321,1.295) 2(1.321,0.66) 3(1.321,0) 4(1.321,-0.66) 5(1.321,-1.295)
  rect 1.905x1.168 smd: 6(-1.321,0.838) 11(-1.321,-0.838)
  rect 1.905x2.388 smd: 7(-1.321,2.921) 10(-1.321,-2.921)
  rect 2.108x1.473 smd: 8(0.965,2.464) 9(0.965,-2.464)
CON_2
  round 1.651 hole 1.092: 1(-1.27,0) 2(1.27,0)
CONN3_BOX
  rect 1.7x1.7 hole 0.9: 1(-1.27,0)
  round 1.7 hole 0.9: 2(1.27,0) 3(3.81,0)
CRY3225_M
  rect 1.194x1.194 smd: 1(1.092,0.813) 2(-1.092,0.813) 3(-1.092,-0.813) 4(1.092,-0.813)
D0603
  rect 0.762x0.762 smd: 1(-0.787,0) 2(0.787,0)
ESD0402
  custom 0.61x0.406 smd: 1(-0.508,0) 2(0.508,0)
FBGA96-10X14
  round 0.381 smd: A1(-3.2,5.994) A2(-2.388,5.994) A3(-1.6,5.994) A7(1.6,5.994) A8(2.388,5.994) A9(3.2,5.994) B1(-3.2,5.207) B2(-2.388,5.207) B3(-1.6,5.207) B7(1.6,5.207) B8(2.388,5.207) B9(3.2,5.207) C1(-3.2,4.394) C2(-2.388,4.394) C3(-1.6,4.394) C7(1.6,4.394) C8(2.388,4.394) C9(3.2,4.394) D1(-3.2,3.607) D2(-2.388,3.607) D3(-1.6,3.607) D7(1.6,3.607) D8(2.388,3.607) D9(3.2,3.607) E1(-3.2,2.794) E2(-2.388,2.794) E3(-1.6,2.794) E7(1.6,2.794) E8(2.388,2.794) E9(3.2,2.794) F1(-3.2,2.007) F2(-2.388,2.007) F3(-1.6,2.007) F7(1.6,2.007) F8(2.388,2.007) F9(3.2,2.007) G1(-3.2,1.194) G2(-2.388,1.194) G3(-1.6,1.194) G7(1.6,1.194) G8(2.388,1.194) G9(3.2,1.194) H1(-3.2,0.406) H2(-2.388,0.406) H3(-1.6,0.406) H7(1.6,0.406) H8(2.388,0.406) H9(3.2,0.406) J1(-3.2,-0.406) J2(-2.388,-0.406) J3(-1.6,-0.406) J7(1.6,-0.406) J8(2.388,-0.406) J9(3.2,-0.406) K1(-3.2,-1.194) K2(-2.388,-1.194) K3(-1.6,-1.194) K7(1.6,-1.194) K8(2.388,-1.194) K9(3.2,-1.194) L1(-3.2,-2.007) L2(-2.388,-2.007) L3(-1.6,-2.007) L7(1.6,-2.007) L8(2.388,-2.007) L9(3.2,-2.007) M1(-3.2,-2.794) M2(-2.388,-2.794) M3(-1.6,-2.794) M7(1.6,-2.794) M8(2.388,-2.794) M9(3.2,-2.794) N1(-3.2,-3.607) N2(-2.388,-3.607) N3(-1.6,-3.607) N7(1.6,-3.607) N8(2.388,-3.607) N9(3.2,-3.607) P1(-3.2,-4.394) P2(-2.388,-4.394) P3(-1.6,-4.394) P7(1.6,-4.394) P8(2.388,-4.394) P9(3.2,-4.394) R1(-3.2,-5.207) R2(-2.388,-5.207) R3(-1.6,-5.207) R7(1.6,-5.207) R8(2.388,-5.207) R9(3.2,-5.207) T1(-3.2,-5.994) T2(-2.388,-5.994) T3(-1.6,-5.994) T7(1.6,-5.994) T8(2.388,-5.994) T9(3.2,-5.994)
FBGA169_0P5_14X18MM
  round 0.254 smd: A4(-1.75,6.75) A6(-0.75,6.75) A9(0.75,6.75) A11(1.75,6.75) AE1(-3.25,-5.25) AE14(3.25,-5.25) AG2(-2.75,-6.25) AG13(2.75,-6.25) AH4(-1.75,-6.75) AH6(-0.75,-6.75) AH9(0.75,-6.75) AH11(1.75,-6.75) B2(-2.75,6.25) B13(2.75,6.25) D1(-3.25,5.25) D14(3.25,5.25) J2(-2.75,2.75) J3(-2.25,2.75) J4(-1.75,2.75) J5(-1.25,2.75) J6(-0.75,2.75) J7(-0.25,2.75) J8(0.25,2.75) J9(0.75,2.75) J10(1.25,2.75) J11(1.75,2.75) J12(2.25,2.75) J13(2.75,2.75) K2(-2.75,2.25) K3(-2.25,2.25) K4(-1.75,2.25) K5(-1.25,2.25) K6(-0.75,2.25) K7(-0.25,2.25) K8(0.25,2.25) K9(0.75,2.25) K10(1.25,2.25) K11(1.75,2.25) K12(2.25,2.25) K13(2.75,2.25) L2(-2.75,1.75) L3(-2.25,1.75) L4(-1.75,1.75) L12(2.25,1.75) L13(2.75,1.75) M2(-2.75,1.25) M3(-2.25,1.25) M5(-1.25,1.25) M6(-0.75,1.25) M7(-0.25,1.25) M8(0.25,1.25) M9(0.75,1.25) M10(1.25,1.25) M12(2.25,1.25) M13(2.75,1.25) N2(-2.75,0.75) N3(-2.25,0.75) N5(-1.25,0.75) N10(1.25,0.75) N12(2.25,0.75) N13(2.75,0.75) P2(-2.75,0.25) P3(-2.25,0.25) P5(-1.25,0.25) P10(1.25,0.25) P12(2.25,0.25) P13(2.75,0.25) R2(-2.75,-0.25) R3(-2.25,-0.25) R5(-1.25,-0.25) R10(1.25,-0.25) R12(2.25,-0.25) R13(2.75,-0.25) T2(-2.75,-0.75) T3(-2.25,-0.75) T5(-1.25,-0.75) T10(1.25,-0.75) T12(2.25,-0.75) T13(2.75,-0.75) U2(-2.75,-1.25) U3(-2.25,-1.25) U5(-1.25,-1.25) U6(-0.75,-1.25) U7(-0.25,-1.25) U8(0.25,-1.25) U9(0.75,-1.25) U10(1.25,-1.25) U12(2.25,-1.25) U13(2.75,-1.25) V2(-2.75,-1.75) V3(-2.25,-1.75) V12(2.25,-1.75) V13(2.75,-1.75) W2(-2.75,-2.25) W3(-2.25,-2.25) W4(-1.75,-2.25) W5(-1.25,-2.25) W6(-0.75,-2.25) W7(-0.25,-2.25) W8(0.25,-2.25) W9(0.75,-2.25) W10(1.25,-2.25) W11(1.75,-2.25) W12(2.25,-2.25) W13(2.75,-2.25) Y2(-2.75,-2.75) Y3(-2.25,-2.75) Y4(-1.75,-2.75) Y5(-1.25,-2.75) Y6(-0.75,-2.75) Y7(-0.25,-2.75) Y8(0.25,-2.75) Y9(0.75,-2.75) Y10(1.25,-2.75) Y11(1.75,-2.75) Y12(2.25,-2.75) Y13(2.75,-2.75)
  oval 0.3x0.2 smd: AA1(-3.25,-3.25) AA14(3.25,-3.25) H1(-3.25,3.25) H14(3.25,3.25) J1(-3.25,2.75) J14(3.25,2.75) K1(-3.25,2.25) K14(3.25,2.25) L1(-3.25,1.75) L14(3.25,1.75) M1(-3.25,1.25) M14(3.25,1.25) N1(-3.25,0.75) N14(3.25,0.75) P1(-3.25,0.25) P14(3.25,0.25) R1(-3.25,-0.25) R14(3.25,-0.25) T1(-3.25,-0.75) T14(3.25,-0.75) U1(-3.25,-1.25) U14(3.25,-1.25) V1(-3.25,-1.75) V14(3.25,-1.75) W1(-3.25,-2.25) W14(3.25,-2.25) Y1(-3.25,-2.75) Y14(3.25,-2.75)
  oval 0.2x0.3 smd: AA2(-2.75,-3.25) AA3(-2.25,-3.25) AA4(-1.75,-3.25) AA5(-1.25,-3.25) AA6(-0.75,-3.25) AA7(-0.25,-3.25) AA8(0.25,-3.25) AA9(0.75,-3.25) AA10(1.25,-3.25) AA11(1.75,-3.25) AA12(2.25,-3.25) AA13(2.75,-3.25) H2(-2.75,3.25) H3(-2.25,3.25) H4(-1.75,3.25) H5(-1.25,3.25) H6(-0.75,3.25) H7(-0.25,3.25) H8(0.25,3.25) H9(0.75,3.25) H10(1.25,3.25) H11(1.75,3.25) H12(2.25,3.25) H13(2.75,3.25)
FPC05P24
  rect 0.305x1.499 smd: 1(5.74,1.372) 2(5.258,1.372) 3(4.75,1.372) 4(4.242,1.372) 5(3.759,1.372) 6(3.251,1.372) 7(2.743,1.372) 8(2.261,1.372) 9(1.753,1.372) 10(1.245,1.372) 11(0.762,1.372) 12(0.254,1.372) 13(-0.254,1.372) 14(-0.762,1.372) 15(-1.245,1.372) 16(-1.753,1.372) 17(-2.261,1.372) 18(-2.743,1.372) 19(-3.251,1.372) 20(-3.759,1.372) 21(-4.242,1.372) 22(-4.75,1.372) 23(-5.258,1.372) 24(-5.74,1.372)
  rect 1.854x2.591 smd: 25(-7.696,-0.127) 26(7.696,-0.127)
HEARDER_2_PITCH_1P25MM
  rect 1.016x1.016 hole 0.508: 1(0.45,0.625)
  round 1.016 hole 0.508: 2(0.45,-0.625)
HEARDER_4_PITCH_1P25MM
  rect 1.016x1.016 hole 0.508: 1(0.45,1.875)
  round 1.016 hole 0.508: 2(0.45,0.625) 3(0.45,-0.625) 4(0.45,-1.875)
IN4D_5X5
  rect 3.988x1.499 smd: 1(0,-1.245) 2(0,1.245)
IND_3X3
  rect 2.997x1.092 smd: 1(0,-0.94) 2(0,0.94)
IND_HEX
  rect 2.007x2.794 smd: 1(-4.039,0) 2(4.039,0)
L0603
  rect 1.016x1.016 smd: 1(-0.762,0) 2(0.762,0)
LAN8270A
  rect 0.279x0.686 smd: 1(-1.346,-1.88) 2(-0.838,-1.88) 3(-0.33,-1.88) 4(0.152,-1.88) 5(0.66,-1.88) 6(1.168,-1.88) 13(1.168,1.905) 14(0.66,1.905) 15(0.152,1.905) 16(-0.33,1.905) 17(-0.838,1.905) 18(-1.346,1.905)
  custom 0.711x0.305 smd: 7(1.803,-1.219) 8(1.803,-0.737) 9(1.803,-0.229) 10(1.803,0.279) 11(1.803,0.762) 12(1.803,1.27) 19(-1.981,1.27) 20(-1.981,0.762) 21(-1.981,0.279) 22(-1.981,-0.229) 23(-1.981,-0.737) 24(-1.981,-1.219)
  rect 1.092x1.092 smd: 25(0.61,0.711) 26(0.61,-0.686) 27(-0.787,-0.686) 28(-0.787,0.711)
MP2365
  rect 0.61x1.6 smd: 1(-1.905,-2.692) 2(-0.635,-2.692) 3(0.635,-2.692) 4(1.905,-2.692) 5(1.905,2.692) 6(0.635,2.692) 7(-0.635,2.692) 8(-1.905,2.692)
  rect 3.505x2.616 smd: 9(0,0)
MSOP8
  oval 0.406x1.499 smd: 1(-0.965,-2.261) 2(-0.33,-2.261) 3(0.33,-2.261) 4(0.965,-2.261) 5(0.965,2.261) 6(0.33,2.261) 7(-0.33,2.261) 8(-0.965,2.261)
PJ-033A
  oval 1.524x3.175 hole 0.889: 1(3.2,0) 2(-3.2,3.912) 3(-3.2,-2.388)
POE
  round 2.032 hole 1.143: 1(-24.765,0.635) 2(-22.225,0.635) 7(18.415,0.635) 8(20.955,0.635)
QFN48
  rect 0.254x1.092 smd: 1(-2.21,-3.048) 2(-1.803,-3.048) 3(-1.397,-3.048) 4(-0.991,-3.048) 5(-0.61,-3.048) 6(-0.203,-3.048) 7(0.203,-3.048) 8(0.61,-3.048) 9(0.991,-3.048) 10(1.397,-3.048) 11(1.803,-3.048) 12(2.21,-3.048) 25(2.21,3.048) 26(1.803,3.048) 27(1.397,3.048) 28(0.991,3.048) 29(0.61,3.048) 30(0.203,3.048) 31(-0.203,3.048) 32(-0.61,3.048) 33(-0.991,3.048) 34(-1.397,3.048) 35(-1.803,3.048) 36(-2.21,3.048)
  rect 1.092x0.254 smd: 13(3.048,-2.21) 14(3.048,-1.803) 15(3.048,-1.397) 16(3.048,-0.991) 17(3.048,-0.61) 18(3.048,-0.203) 19(3.048,0.203) 20(3.048,0.61) 21(3.048,0.991) 22(3.048,1.397) 23(3.048,1.803) 24(3.048,2.21) 37(-3.048,2.21) 38(-3.048,1.803) 39(-3.048,1.397) 40(-3.048,0.991) 41(-3.048,0.61) 42(-3.048,0.203) 43(-3.048,-0.203) 44(-3.048,-0.61) 45(-3.048,-0.991) 46(-3.048,-1.397) 47(-3.048,-1.803) 48(-3.048,-2.21)
  rect 4.394x4.394 smd: 49(0,0)
R0402
  rect 0.508x0.508 smd: 1(-0.483,0) 2(0.483,0)
R0603
  rect 0.762x0.762 smd: 1(-0.787,0) 2(0.787,0)
R0805
  rect 1.346x1.397 smd: 1(-0.889,0) 2(0.889,0)
RCA80-8
  rect 0.483x0.61 smd: 1(0.813,-0.508) 4(-0.813,-0.508) 5(-0.813,0.508) 8(0.813,0.508)
  rect 0.33x0.61 smd: 2(0.254,-0.508) 3(-0.254,-0.508) 6(-0.254,0.508) 7(0.254,0.508)
RJ45-VERTICAL
  round 3.683 hole 3.429 unplated: (-5.004,5.588) (-5.004,-5.842)
  round 1.524 hole 0.914: 1(1.346,4.318) 2(3.886,3.048) 3(1.346,1.778) 4(3.886,0.508) 5(1.346,-0.762) 6(3.886,-2.032) 7(1.346,-3.302) 8(3.886,-4.572)
  round 1.778 hole 1.118: 9(-9.144,3.683) 10(-9.144,6.223) 11(-9.144,-6.477) 12(-9.144,-3.937)
  round 1.778 hole 1.651: 13(-1.118,7.747) 14(-1.118,-8.001)
RK616_BGA144
  round 0.406 smd: A1(-4.394,4.394) A2(-3.607,4.394) A3(-2.794,4.394) A4(-2.007,4.394) A5(-1.194,4.394) A6(-0.406,4.394) A7(0.406,4.394) A8(1.194,4.394) A9(2.007,4.394) A10(2.794,4.394) A11(3.607,4.394) A12(4.394,4.394) B1(-4.394,3.607) B2(-3.607,3.607) B3(-2.794,3.607) B4(-2.007,3.607) B5(-1.194,3.607) B6(-0.406,3.607) B7(0.406,3.607) B8(1.194,3.607) B9(2.007,3.607) B10(2.794,3.607) B11(3.607,3.607) B12(4.394,3.607) C1(-4.394,2.794) C2(-3.607,2.794) C3(-2.794,2.794) C4(-2.007,2.794) C5(-1.194,2.794) C6(-0.406,2.794) C7(0.406,2.794) C8(1.194,2.794) C9(2.007,2.794) C10(2.794,2.794) C11(3.607,2.794) C12(4.394,2.794) D1(-4.394,2.007) D2(-3.607,2.007) D3(-2.794,2.007) D4(-2.007,2.007) D5(-1.194,2.007) D6(-0.406,2.007) D7(0.406,2.007) D8(1.194,2.007) D9(2.007,2.007) D10(2.794,2.007) D11(3.607,2.007) D12(4.394,2.007) E1(-4.394,1.194) E2(-3.607,1.194) E3(-2.794,1.194) E4(-2.007,1.194) E5(-1.194,1.194) E6(-0.406,1.194) E7(0.406,1.194) E8(1.194,1.194) E9(2.007,1.194) E10(2.794,1.194) E11(3.607,1.194) E12(4.394,1.194) F1(-4.394,0.406) F2(-3.607,0.406) F3(-2.794,0.406) F4(-2.007,0.406) F5(-1.194,0.406) F6(-0.406,0.406) F7(0.406,0.406) F8(1.194,0.406) F9(2.007,0.406) F10(2.794,0.406) F11(3.607,0.406) F12(4.394,0.406) G1(-4.394,-0.406) G2(-3.607,-0.406) G3(-2.794,-0.406) G4(-2.007,-0.406) G5(-1.194,-0.406) G6(-0.406,-0.406) G7(0.406,-0.406) G8(1.194,-0.406) G9(2.007,-0.406) G10(2.794,-0.406) G11(3.607,-0.406) G12(4.394,-0.406) H1(-4.394,-1.194) H2(-3.607,-1.194) H3(-2.794,-1.194) H4(-2.007,-1.194) H5(-1.194,-1.194) H6(-0.406,-1.194) H7(0.406,-1.194) H8(1.194,-1.194) H9(2.007,-1.194) H10(2.794,-1.194) H11(3.607,-1.194) H12(4.394,-1.194) J1(-4.394,-2.007) J2(-3.607,-2.007) J3(-2.794,-2.007) J4(-2.007,-2.007) J5(-1.194,-2.007) J6(-0.406,-2.007) J7(0.406,-2.007) J8(1.194,-2.007) J9(2.007,-2.007) J10(2.794,-2.007) J11(3.607,-2.007) J12(4.394,-2.007) K1(-4.394,-2.794) K2(-3.607,-2.794) K3(-2.794,-2.794) K4(-2.007,-2.794) K5(-1.194,-2.794) K6(-0.406,-2.794) K7(0.406,-2.794) K8(1.194,-2.794) K9(2.007,-2.794) K10(2.794,-2.794) K11(3.607,-2.794) K12(4.394,-2.794) L1(-4.394,-3.607) L2(-3.607,-3.607) L3(-2.794,-3.607) L4(-2.007,-3.607) L5(-1.194,-3.607) L6(-0.406,-3.607) L7(0.406,-3.607) L8(1.194,-3.607) L9(2.007,-3.607) L10(2.794,-3.607) L11(3.607,-3.607) L12(4.394,-3.607) M1(-4.394,-4.394) M2(-3.607,-4.394) M3(-2.794,-4.394) M4(-2.007,-4.394) M5(-1.194,-4.394) M6(-0.406,-4.394) M7(0.406,-4.394) M8(1.194,-4.394) M9(2.007,-4.394) M10(2.794,-4.394) M11(3.607,-4.394) M12(4.394,-4.394)
SFW10R-1STE1LF
  rect 0.711x4.191 smd: (-5.512,-0.991) (5.512,-0.991)
  rect 0.61x2.007 smd: 1(-4.496,-2.997) 2(-3.505,-2.997) 3(-2.489,-2.997) 4(-1.499,-2.997) 5(-0.508,-2.997) 6(0.508,-2.997) 7(1.499,-2.997) 8(2.489,-2.997) 9(3.505,-2.997) 10(4.496,-2.997)
SK34A
  rect 1.778x2.159 smd: A(2.032,0) C(-2.032,0)
SM0603LED_AC
  rect 0.914x0.914 smd: A(-0.762,0) C(0.762,0)
SMD_LED_RGB
  rect 1.321x1.27 smd: 1(-2.311,1.397) 2(3.251,1.397) 3(-2.311,-0.152) 4(3.251,-0.152) 5(-2.311,-1.702) 6(3.251,-1.702)
SMR0402
  rect 0.508x0.61 smd: 1(-0.457,0) 2(0.457,0)
SOD123
  rect 0.914x1.219 smd: 1(1.626,0) 2(-1.626,0)
SOD523
  rect 0.61x0.711 smd: 1(0.711,0) 2(-0.711,0)
SOIC16
  rect 1.27x0.635 smd: 1(-2.667,4.445) 2(-2.667,3.175) 3(-2.667,1.905) 4(-2.667,0.635) 5(-2.667,-0.635) 6(-2.667,-1.905) 7(-2.667,-3.175) 8(-2.667,-4.445) 9(2.667,-4.445) 10(2.667,-3.175) 11(2.667,-1.905) 12(2.667,-0.635) 13(2.667,0.635) 14(2.667,1.905) 15(2.667,3.175) 16(2.667,4.445)
SOT23
  rect 0.991x1.397 smd: 1(-0.94,-1.092) 2(0.94,-1.092) 3(0,1.092)
SOT23-5
  rect 0.66x1.067 smd: 1(-0.94,-1.092) 2(0,-1.092) 3(0.94,-1.092) 4(0.94,1.092) 5(-0.94,1.092)
SOT23_2
  oval 1.245x0.66 smd: 1(-1,0.95) 2(-1,-0.95) 3(1,0)
SOT-25
  rect 0.66x1.067 smd: 1(-0.94,-1.092) 2(0,-1.092) 3(0.94,-1.092) 4(0.94,1.092) 5(-0.94,1.092)
SSOP28
  rect 0.432x2.261 smd: 1(-4.216,-3.378) 2(-3.581,-3.378) 3(-2.921,-3.378) 4(-2.286,-3.378) 5(-1.626,-3.378) 6(-0.965,-3.378) 7(-0.33,-3.378) 8(0.33,-3.378) 9(0.965,-3.378) 10(1.626,-3.378) 11(2.286,-3.378) 12(2.921,-3.378) 13(3.581,-3.378) 14(4.216,-3.378) 15(4.216,3.378) 16(3.581,3.378) 17(2.921,3.378) 18(2.286,3.378) 19(1.626,3.378) 20(0.965,3.378) 21(0.33,3.378) 22(-0.33,3.378) 23(-0.965,3.378) 24(-1.626,3.378) 25(-2.286,3.378) 26(-2.921,3.378) 27(-3.581,3.378) 28(-4.216,3.378)
TO-269AA
  rect 1.118x1.524 smd: 1(-1.27,-2.286) 2(1.27,-2.286) 3(1.27,3.556) 4(-1.27,3.556)
TRC41604NL
  rect 0.762x1.93 smd: 1(-4.47,-4.42) 2(-3.2,-4.42) 3(-1.93,-4.42) 6(1.88,-4.42) 7(3.15,-4.42) 8(4.42,-4.42) 9(4.42,4.369) 10(3.15,4.369) 11(1.88,4.369) 14(-1.93,4.369) 15(-3.2,4.369) 16(-4.47,4.369)
TSOP48
  rect 1.829x0.254 smd: 1(-9.601,5.74) 2(-9.601,5.258) 3(-9.601,4.75) 4(-9.601,4.242) 5(-9.601,3.759) 6(-9.601,3.251) 7(-9.601,2.743) 8(-9.601,2.261) 9(-9.601,1.753) 10(-9.601,1.245) 11(-9.601,0.762) 12(-9.601,0.254) 13(-9.601,-0.254) 14(-9.601,-0.762) 15(-9.601,-1.245) 16(-9.601,-1.753) 17(-9.601,-2.261) 18(-9.601,-2.743) 19(-9.601,-3.251) 20(-9.601,-3.759) 21(-9.601,-4.242) 22(-9.601,-4.75) 23(-9.601,-5.258) 24(-9.601,-5.74) 25(9.601,-5.74) 26(9.601,-5.258) 27(9.601,-4.75) 28(9.601,-4.242) 29(9.601,-3.759) 30(9.601,-3.251) 31(9.601,-2.743) 32(9.601,-2.261) 33(9.601,-1.753) 34(9.601,-1.245) 35(9.601,-0.762) 36(9.601,-0.254) 37(9.601,0.254) 38(9.601,0.762) 39(9.601,1.245) 40(9.601,1.753) 41(9.601,2.261) 42(9.601,2.743) 43(9.601,3.251) 44(9.601,3.759) 45(9.601,4.242) 46(9.601,4.75) 47(9.601,5.258) 48(9.601,5.74)
unnamed
  round 1.016 smd: (0,0)
unnamed#2
  round 3.302 hole 3.048: (0,0)
USB_CAM
  oval 2.007x0.61 smd: 1(-5.004,2.997) 2(-5.004,2.007) 3(-5.004,0.991) 4(-5.004,0) 5(-5.004,-0.991)
  rect 2.286x1.524 smd: 6(-0.991,3.988) 7(-0.991,-2.007)
USD_SOCKET
  rect 0.762x1.118 smd: 1(3.15,0.305) 2(2.057,0.305) 3(0.965,0.305) 4(-0.152,0.305) 5(-1.245,0.305) 6(-2.337,0.305) 7(-3.454,0.305) 8(-4.547,0.305)
  rect 1.219x1.016 smd: 9(5.639,6.401) 10(5.639,10.109)
  rect 1.575x1.372 smd: 11(5.563,0.432)
  rect 1.118x1.829 smd: 12(-5.766,0.66)
  rect 1.93x1.372 smd: 13(-3.734,11.074) 14(2.235,11.074)
USOP_10P
  rect 1.118x0.279 smd: 1(-2.134,1.016) 2(-2.134,0.508) 3(-2.134,0) 4(-2.134,-0.508) 5(-2.134,-1.016) 6(2.134,-1.016) 7(2.134,-0.508) 8(2.134,0) 9(2.134,0.508) 10(2.134,1.016)
WCM_2012HDMI_900T
  rect 0.406x0.889 smd: 1(-0.406,-0.838) 2(0.406,-0.838) 3(0.406,0.838) 4(-0.406,0.838)
WIFI_BT_R
  oval 1.6x2.997 smd: 1(-5.004,-6.198) 2(-2.21,-6.198) 3(1.295,-6.198) 4(3.81,-6.198) 5(4.293,6.198) 6(2.311,6.198)

## Nets
3V3_MIC: C235.2 C239.2 C240.1 C241.2 R48.1 U8.5(VCC) U30.5(VOUT)
48V-POE1: D11.2(AC IN 2) J14.4(NC1) J14.5(NC2)
48V-POE2: D11.1(AC IN 1) J14.7(NC3) J14.8(NC4)
AVDD_COM: R31.1 R142.1 U5.46(OUT3) U12.W10(AVDD_COM)
